# Altium PCB TIDA-010954-RevB.PcbDoc (part 5 of 8)
Units mm, origin at the board's own origin, x right, y up, seen from the top; angles counter-clockwise.
Board outline 290 x 100 mm, 6 copper layers (Top Layer, Mid1, Mid2, Mid3, Mid4, Bottom Layer), stack 1.59 mm thick; 394 components, 204 nets, 1137 pads, 2188 vias.
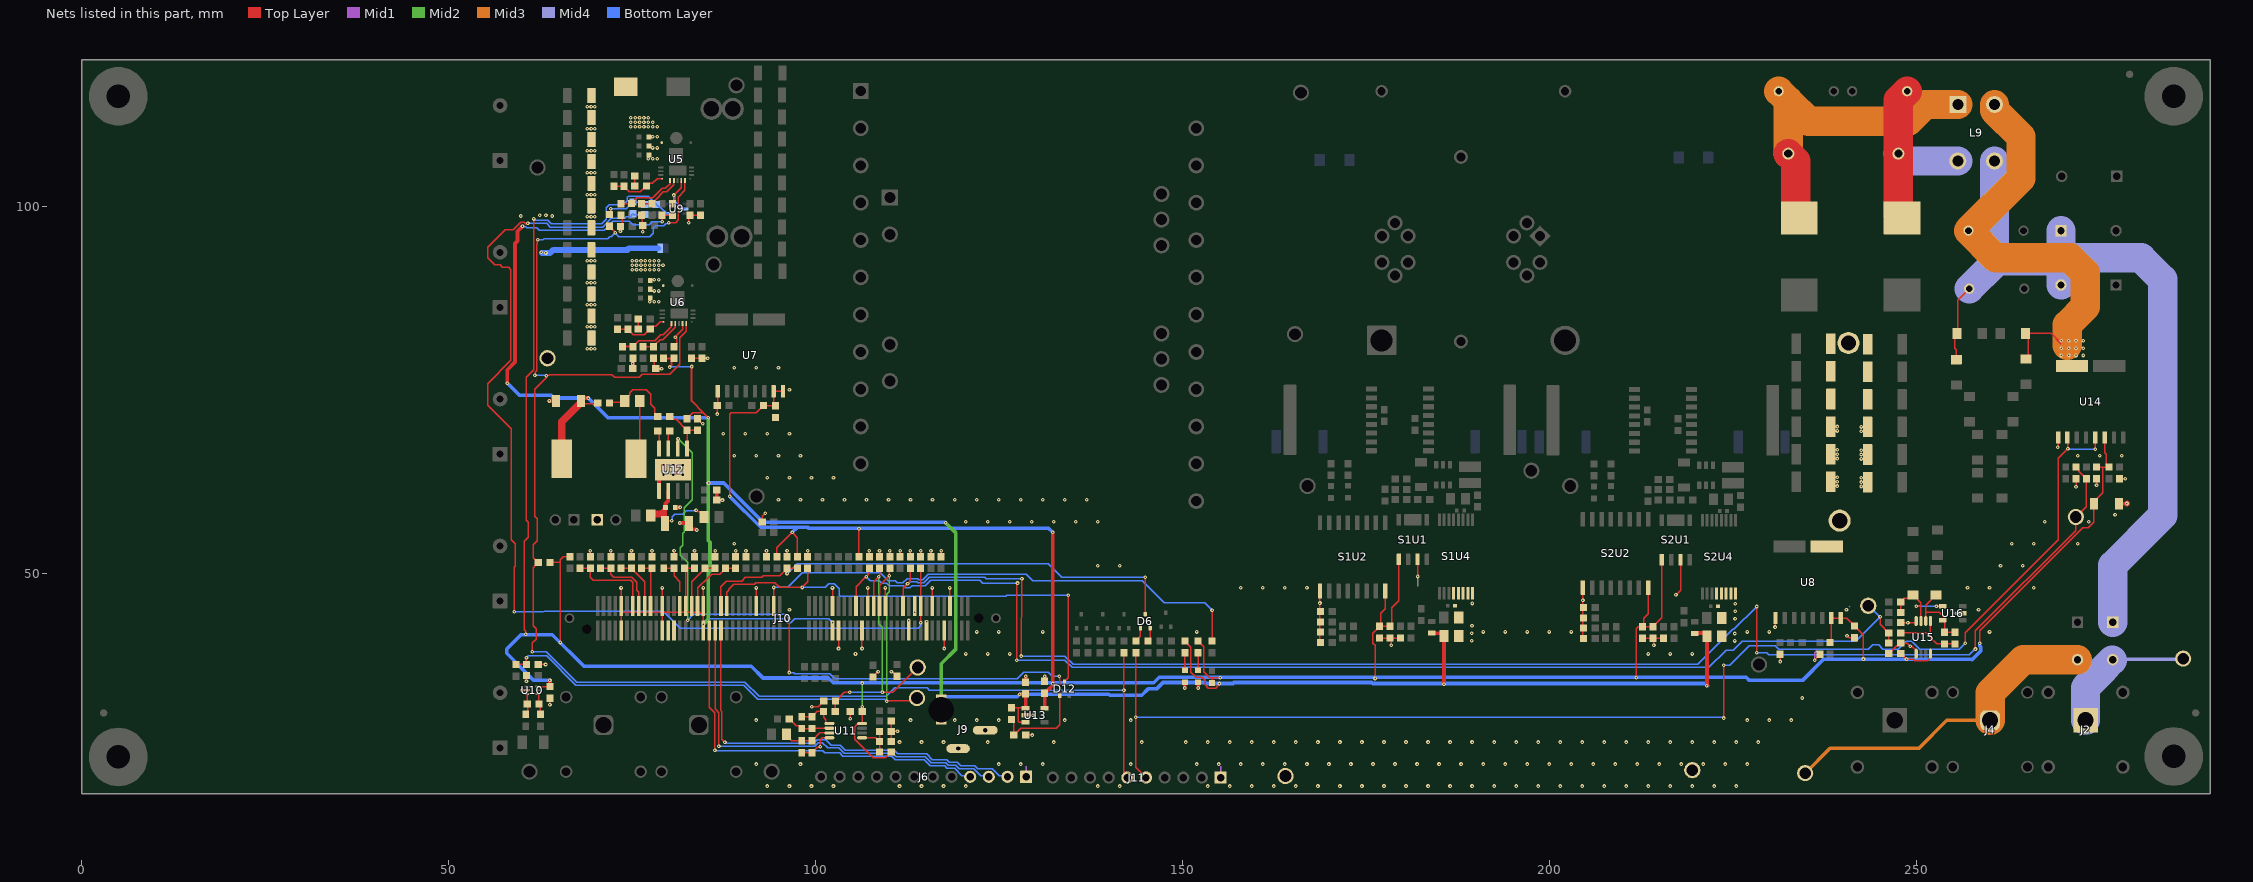
[diagram p7: the nets of this part, all layers, seen from the top]

## Via types
v1: diameter 0.5, hole 0.2, Top Layer to Bottom Layer, tented both sides, 1333 vias
v2: diameter 0.5/0.5/0.5/0.5/0.5/0.5 (per signal layer), hole 0.2, Top Layer to Bottom Layer, tented both sides, 847 vias
v3: diameter 0.63, hole 0.33, Top Layer to Bottom Layer, tented both sides, 6 vias
v4: diameter 0.5, hole 0.2, Top Layer to Bottom Layer, 1 vias
v5: diameter 0.5/0.5/0.5/0.5/0.5/0.5 (per signal layer), hole 0.2, Top Layer to Bottom Layer, 1 vias

## Nets (pads, with @x,y where several pads share a name; then routed paths per layer and width w, separated by ;. In a path a pad name is that pad's centre, name@x,y a point inside that pad or via, vN(x,y) a via of type N, cw(c..) or ccw(c..) an arc to the next point about the centre after c; other vN are vias at no path point) (continued)
L_M: (continued)
  Mid4 w4: C129.2@257.15,88.8 260.6,92.25 ; L9.3@260.6,106.2 260.6,92.25 ; 269.2,92.6 260.911,92.561 260.6,92.25 ; R96.1@269.65,96.7 269.65,89.35 R99.2@269.7,89.3 ; 269.7,93 280.571,93 283.5,90.071 283.5,57.9 276.7,51.1 F1.1@276.7,43.34
LED_RED: J10.59 R82.2 | length 70.3
  Top Layer w0.2: J10.59@94.3,45.6 v1(94.3,48.1) ; R82.2@154,40.9 v1(154,45)
  Bottom Layer w0.2: v1(94.3,48.1) 96.166,48.1 98.166,50.1 108.822,50.1 109.917,49.006 110.851,49.006 111.107,48.75 111.893,48.75 112.443,49.3 113.922,49.3 114.072,49.15 114.584,49.15 115.334,49.9 128.7,49.9 129.6,49 144.5,49 147.5,46 153,46 v1(154,45)
LEG1_HS: C7.2 R19.2 R20.2 U5.11 | length 7.6
  Top Layer w0.2: R20.2@72.5,102.732 R19.2@73.9,102.732 73.9,102.707 74.625,101.982 76.125,101.982 76.925,102.782 C7.2@76.95,102.782 77.3,103.132 77.761,103.132 78.386,103.757 U5.11@79.075,103.757
LEG2_HS: C18.2 R30.2 R31.2 U6.11 | length 7.3
  Top Layer w0.2: R31.2@73,83.25 R30.2@74.4,83.25 74.4,83.225 75.125,82.5 76.625,82.5 77.425,83.3 C18.2@77.45,83.3 77.8,83.65 78.2,83.65 78.825,84.275 U6.11@79.275,84.275
MidHV: C53.2 C54.1 C57.2 C58.1 C61.2 C62.1 C63.2 C64.1 C65.2 C66.1 C67.2 C68.1 pad.1@239.5,57.2 pad.1@240.7,81.4 U8.1
  other v2: 242.45,61.852 239.15,61.906 242.45,62.452 239.15,62.506 242.45,63.052 239.15,63.106 242.45,65.607 239.15,65.662 242.45,66.207 239.15,66.262 242.45,66.807 239.15,66.862 242.45,69.363 239.15,69.417 242.45,69.963 239.15,70.017
N_EXT: F2.2 J4.1 TP5.1 | length 45.9
  Mid3 w0.5: TP5.1@234.7,22.6 234.7,22.7 TP5.1@234.8,22.8 238.2,26.2 250.3,26.2 254.1,30 J4.1@260,30
  Mid3 w4: J4.1@260,30 260,33.74 264.52,38.26 F2.2@271.9,38.26
N_M: C128.1 L9.4 R97.1 R105.1 U14.2 | length 59.3
  Top Layer w0.2: R105.1@264.825,79.75 264.836,79.739 R105.1@265.495,79.739 ; R97.1@264.825,82.7 268.3,82.7 269.7,81.3 ; R105.1@265.225,79.75 R97.1@265.225,82.1
  Mid3 w4: L9.4@260.6,113.9 260.6,113.1 264.2,109.5 264.2,103.85 C128.1@257.05,96.7 260.75,93 270.9,93 272.95,90.95 272.95,86.325 270.5,83.875 270.5,81.1
  other v2: 269.7,79.7 270.7,79.7 271.7,79.7 272.7,79.7 269.7,80.7 270.7,80.7 271.7,80.7 272.7,80.7 269.7,81.7 270.7,81.7 271.7,81.7 272.7,81.7
NetC7_1: C7.1 R18.1 | length 1.8
  Top Layer w0.2: C7.1@75.35,102.782 R18.1@75.35,104.182 R18.1@75.35,104.557
NetC18_1: C18.1 R29.1 | length 1.4
  Top Layer w0.2: C18.1@75.85,83.3 R29.1@75.85,84.7
NetC21_1: C21.1 R15.2 U5.12 | length 8.1
  Top Layer w0.2: C21.1@73.65,100.382 R15.2@74.8,100.382 ; R15.2@74.8,100.482 R15.2@74.9,100.482 ; R15.2@74.9,100.407 74.9,100.432 75.65,101.182 77.8,101.182 79.075,102.457 79.521,102.457 80.175,103.111 U5.12@80.175,103.532
NetC23_1: C23.1 R21.2 U5.13 | length 6
  Top Layer w0.2: C23.1@76.4,100.382 R21.2@77.675,100.382 77.775,100.382 77.775,100.507 78.26,100.992 78.26,101.017 79.25,102.007 79.707,102.007 80.675,102.975 U5.13@80.675,103.532
NetC30_1: C30.1 R27.2 U6.12 | length 8.1
  Top Layer w0.2: C30.1@75.1,80.9 75.1,80.925 75.875,81.7 76.956,81.7 78.059,81.7 78.884,82.525 79.236,82.525 80.35,83.639 80.35,84.025 U6.12@80.375,84.05
  Top Layer w0.25: R27.2@73.85,80.9 C30.1@75.1,80.9
NetC32_1: C32.1 R32.2 U6.13 | length 5.8
  Top Layer w0.2: R32.2@76.5,80.9 C32.1@77.7,80.9 ; C32.1@77.875,80.9 78.225,81.25 78.225,81.3 78.801,81.876 79.195,81.876 80.875,83.556 U6.13@80.875,84.05
NetC89_1: C89.1 R45.2 U10.3 | length 2.9
  Top Layer w0.2: R45.2@60.5,30.8 60.8,31.1 C89.1@60.8,32.1 ; U10.3@60.6,33.6 60.65,33.6 60.7,33.55 C89.1@60.7,32.2
NetC89_2: C89.2 R47.2 U10.4 | length 2.7
  Top Layer w0.2: U10.4@62.2,33.6 62.25,33.6 62.3,33.55 C89.2@62.3,32.2 ; R47.2@62.5,30.8 C89.2@62.5,32
NetC91_1: C91.1 R49.2 R50.2 U11.1 | length 5.5
  Top Layer w0.2: R49.2@98.1,30.475 C91.1@99.5,30.475 99.5,30.5 100.2,31.2 R50.2@101.075,31.2 101.075,30.409 101.384,30.1 101.384,29.69 101.499,29.575 U11.1@101.875,29.575
NetC91_2: C91.2 R48.2 R49.1 U11.2 | length 6.1
  Top Layer w0.2: R48.2@96.4,30.2 96.425,30.2 97.35,29.275 97.725,29.275 98.1,28.9 R49.1@98.1,28.875 C91.2@99.5,28.875 99.55,28.925 U11.2@101.875,28.925
NetC93_2: C93.2 R51.2 R52.1 U11.3 | length 6.8
  Top Layer w0.2: R51.2@96.016,28.1 96.016,27.935 96.751,27.2 C93.2@98.1,27.2 R52.1@99.5,27.2 99.5,27.225 100.55,28.275 U11.3@101.875,28.275
NetC95_2: C95.2 R53.2 R55.1 U11.5 | length 5.4
  Top Layer w0.2: U11.5@106.325,27.625 108.15,27.625 108.675,27.1 R55.1@108.7,27.1 ; R53.2@108.7,25.7 R55.1@108.7,27.1 ; C95.2@108.7,28.5 R55.1@108.7,27.1
NetC98_2: C98.2 C138.2 L6.2 R98.2 U12.2 | length 13.6
  Top Layer w0.2: C98.2@79.525,57.2 79.525,56.875 79.85,57.2 v1(80.4,57.2) ; v1(83.7,58.6) 83.781,58.6 83.981,58.4 84.249,58.4 84.4,58.249 R98.2@84.4,58.1 ; R98.2@84.6,57.351 R98.2@84.6,57.5
  Top Layer w0.5: 79.1,58.1 79.1,58.55 C138.2@79.488,58.937 ; C98.2@79.488,57.212 79.488,58.1 C138.2@79.488,58.937 ; C138.2@79.525,59 79.525,58.975 C138.2@79.488,58.937 ; C138.2@79.528,59 79.528,59.528 79.935,59.935 U12.2@79.935,61.254
  Top Layer w1: L6.2@77.516,57.9 77.516,57.965 77.651,58.1 79.1,58.1
  Bottom Layer w0.2: v1(80.4,57.2) 80.457,57.257 80.457,57.71 80.822,58.075 81.916,58.075 82.392,58.55 83.65,58.55 v1(83.7,58.6)
NetC100_1: C100.1 U12.7 | length 2.2
  Top Layer w0.2: U12.7@79.9,67.3 79.935,67.335 79.935,69.235 C100.1@80.1,69.4
NetC100_2: C100.2 L7.1 R58.1 U12.8 | length 7.8
  Top Layer w0.2: L7.1@76,67.6 76.016,67.616 R58.1@76.016,73.5 ; C100.2@78.5,69.4 78.665,69.235 78.665,67.665 U12.8@78.6,67.6
NetC104_2: C104.2 C105.1 R58.2 | length 10.8
  Top Layer w0.2: C104.2@72,73.2 72.1,73.3 73.968,73.3 73.984,73.316 R58.2@73.984,73.5 ; R58.2@73.9,73.8 74.119,73.8 74.681,74.362 74.681,74.59 75.091,75 76.941,75 77.52,74.421 77.52,73.08 78.1,72.5 78.1,71.875 78.475,71.5 C105.1@78.5,71.5 ; R58.2@74.019,73.3 R58.2@74.519,72.8
NetC105_2: C105.2 R56.1 R59.2 U12.5 | length 7.3
  Top Layer w0.2: C105.2@79.8,71.6 C105.2@80.05,71.35 ; C105.2@80.1,71.4 80.475,71.025 80.975,71.025 R56.1@82.4,69.6 ; U12.5@82.475,67.004 R56.1@82.475,69.425 ; R56.1@82.475,69.5 R56.1@82.475,69.6 ; R56.1@82.5,69.5 R59.2@83.9,69.5
NetC110_1: C110.1 J10.89 R88.2 | length 6.6
  Top Layer w0.2: J10.89@82.3,45.6 82.3,50.5 R88.2@82.1,50.7 C110.1@83.5,50.7
NetC111_1: C111.1 J10.87 R87.2 | length 7.2
  Top Layer w0.2: J10.87@83.1,45.6 83.1,48.875 84.9,50.675 R87.2@84.9,50.7 C111.1@86.3,50.7
NetC120_1: C120.1 J10.91 R89.2 | length 4.9
  Top Layer w0.2: R89.2@79.3,50.7 C120.1@80.7,50.7 80.7,49.687 81.5,48.887 81.5,47.5
NetC121_1: C121.1 J10.85 R86.2 | length 8.7
  Top Layer w0.2: J10.85@83.9,45.6 83.906,45.606 83.906,48.024 85.332,49.45 85.384,49.45 85.834,49.9 86.899,49.9 87.129,50.13 87.155,50.13 87.7,50.675 R86.2@87.7,50.7 C121.1@89.1,50.7
NetC122_1: C122.1 J10.107 R93.2 | length 11.1
  Top Layer w0.2: R93.2@67.9,50.7 C122.1@69.3,50.7 69.3,49.5 69.7,49.1 74.8,49.1 75.1,48.8 J10.107@75.1,46.4
NetC123_1: C123.1 J10.105 R92.2 | length 9.5
  Top Layer w0.2: R92.2@70.7,50.7 C123.1@72.1,50.7 72.1,49.9 72.5,49.5 74.966,49.5 75.65,48.816 75.65,47.724 75.904,47.47 J10.105@75.904,45.604
NetC124_1: C124.1 J10.103 R91.2 | length 6.4
  Top Layer w0.2: R91.2@73.5,50.7 C124.1@74.9,50.7 74.9,50.675 75.275,50.3 75.277,50.3 76.7,48.877 J10.103@76.7,46.4
NetC125_1: C125.1 J10.101 R90.2 | length 5.8
  Top Layer w0.2: R90.2@76.3,50.7 C125.1@77.7,50.7 77.5,50.5 J10.101@77.5,46.4
NetC130_2: C130.2 C132.1 L9.1 L10.2 | length 43.8
  Top Layer w4: C132.1@232.5,107.2 233.5,106.2 233.5,98.7 233.75,98.45 L10.2@234,98.45
  Mid3 w4: C130.2@231.2,115.7 232.5,114.4 ; C132.1@232.5,107.2 232.5,114.4 ; L9.1@255.6,113.9 251.143,113.9 248.843,111.6 235.3,111.6 232.5,114.4
NetC131_1: C131.1 C132.2 L8.2 L9.2 | length 26.6
  Top Layer w4: L8.2@248,98.45 247.75,98.45 247.5,98.7 C132.2@247.5,107.2 247.5,114.5 C131.1@248.7,115.7
  Mid4 w4: C132.2@247.5,107.2 248.5,106.2 L9.2@255.6,106.2
NetC134_1: C134.1 R104.1 R111.1 U15.1 | length 10.1
  Top Layer w0.2: R111.1@247.8,41.9 251.875,41.9 ; U15.1@251.875,43.525 251.875,41.9 ; 251.9,41.9 251.875,41.9 ; C134.1@255.2,40.4 R104.1@253.8,40.4 252.7,40.4 251.875,41.225 251.875,41.9
NetC134_2: C134.2 R104.2 R110.2 U15.2 U16.5 | length 10.5
  Top Layer w0.2: U15.2@251.225,43.525 251.225,44.612 ; R110.2@252.6,47.075 252.475,47.075 251.95,46.55 251.95,46.425 251.225,45.7 251.225,44.612 ; C134.2@255.2,42 R104.2@253.8,42 253.8,43.45 253.6,43.65 U16.5@253.525,43.65 253.525,44.275 253.1,44.7 251.312,44.7 251.225,44.612
NetC136_1: C136.1 R117.2 R118.2 U15.3 U16.4 | length 11.8
  Top Layer w0.2: C136.1@247.8,44.7 R118.2@247.8,46.1 247.825,46.1 248.325,46.6 249.025,46.6 R117.2@249.5,47.075 249.625,47.075 250.15,46.55 250.15,46.425 250.575,46 250.575,45.55 ; v1(249.925,45.528) 250.554,45.528 250.575,45.55 ; U15.3@250.575,43.525 250.575,45.55 ; v1(252.687,45.528) 252.709,45.55 U16.4@253.525,45.55
  Bottom Layer w0.2: v1(249.925,45.528) v1(252.687,45.528)
NetD4_1: D4.1 R62.1 | length 2.6
  Top Layer w0.2: D4.1@152,36.6 152.1,36.7 D4.1@152.1,36.825 R62.1@152.1,39.2
NetD5_1: D5.1 R63.1 | length 2.5
  Top Layer w0.2: D5.1@150.3,36.7 D5.1@150.3,36.825 R63.1@150.3,39.2
NetD6_1: D6.1 R64.2 | length 2.2
  Top Layer w0.2: R64.2@143.6,40.6 143.6,40.8 144.25,41.45 D6.1@144.25,42.55
NetD6_2: D6.2 R66.2 | length 2.4
  Top Layer w0.2: R66.2@144.8,40.5 145.55,41.25 D6.2@145.55,42.55